# EAGLE board top (EAGLE 7.2.0)
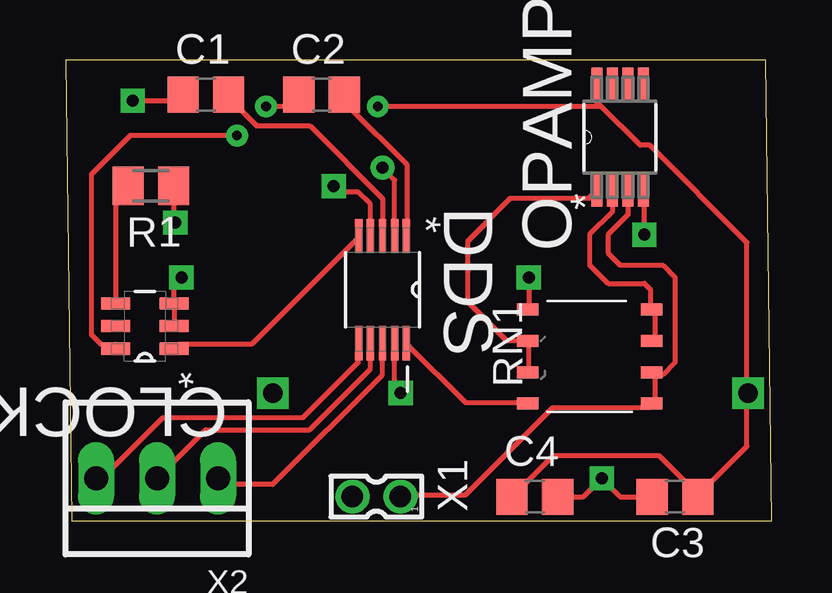
[diagram p0: board, top side]
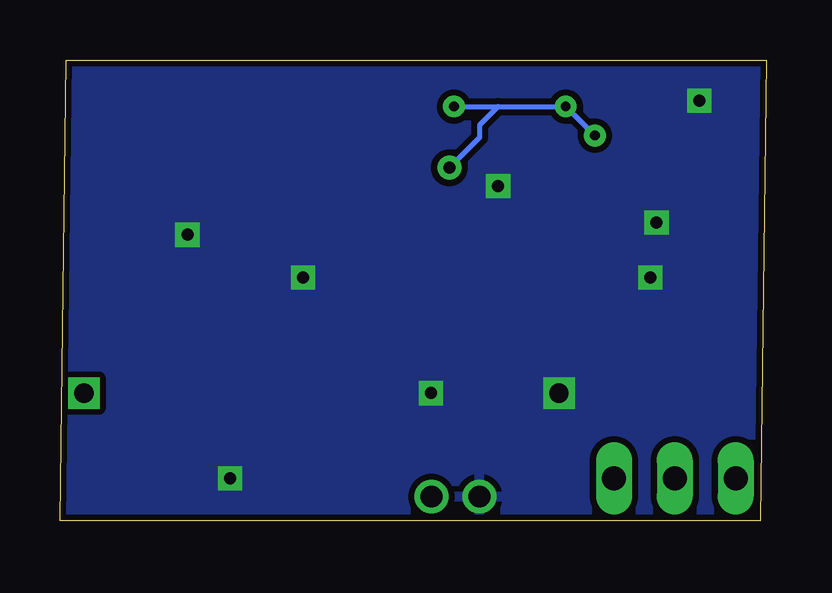
[diagram p1: board, bottom side, seen from below]

Size 29.44 x 19.23 mm. Coordinates in mm from the lower left corner, seen from the top.
Outline: 0.25,0 29.44,0 29.19,19.23 0,19.23 0.25,0
Copper layers (1*16): Top 0.035mm / dielectric 1.5mm / Bottom 0.035mm
Design rules "pcbtrain": minimum track width 0.2mm, minimum drill 0.4mm, track to track 0.2mm, track to pad 0.2mm, pad to pad 0.2mm, via to via 0.2mm, smd to smd 0mil, copper to edge 10mil, drill to drill 0.2mm, minimum pad ring 10mil, minimum via ring 10mil, stop-mask expansion 0.125mm, vias tented up to drill 0mil, thermal gap 10mil
Net classes: 0 default: clearance 0.205 mm
tRestrict: area 11.9,8.4 to 14.5,10.9; area 21.8,13 to 24.4,15.5; area 2.3,7.9 to 4.1,10.7

## Footprints (pad centres in the part's own frame; a part is rotated, then mirrored left to right if it is on the bottom)
C0805 = smd 1.3 x 1.5: 1 -0.95,0; 2 0.95,0
SOT95P280X100-6N = smd 1.219 x 0.508: 1 -1.219,0.94; 2 -1.219,0; 3 -1.219,-0.94; 4 1.219,-0.94; 5 1.219,0; 6 1.219,0.94
SOP50P490X110-10N = smd 1.422 x 0.305: 1 -2.235,0.991; 2 -2.235,0.508; 3 -2.235,0; 4 -2.235,-0.508; 5 -2.235,-0.991; 6 2.235,-0.991; 7 2.235,-0.508; 8 2.235,0; 9 2.235,0.508; 10 2.235,0.991
SOP65P490X109-8N = smd 1.372 x 0.457: 1 -2.21,0.965; 2 -2.21,0.33; 3 -2.21,-0.33; 4 -2.21,-0.965; 5 2.21,-0.965; 6 2.21,-0.33; 7 2.21,0.33; 8 2.21,0.965
M0805 = smd 1.3 x 1.6: 1 -0.95,0; 2 0.95,0
CTS742C083 = smd 0.5 x 0.9: 1 -2.47,-3.848; 2 -1.162,-3.848; 3 0.146,-3.848; 4 1.454,-3.848; 5 1.454,1.308; 6 0.146,1.308; 7 -1.162,1.308; 8 -2.47,1.308
332-02 = drill 0.9 pad 1.27: 1 0,-1; 2 0,1
22-23-2031 = drill 1 long: 1 -2.54,0; 2 0,0; 3 2.54,0

## Placement (x,y rotation side)
C1  100n  [C0805]  5.84,17.78 0 top
C2  10n  [C0805]  10.67,17.78 0 top
C3  10u  [C0805]  25.4,1.02 180 top
C4  0.1u  [C0805]  19.56,1.02 0 top
CLOCK  LTC6906IS6PBF  [SOT95P280X100-6N]  3.3,8.13 180 top
DDS  AD9833BRMZ  [SOP50P490X110-10N]  13.21,9.65 270 top
OPAMP  LMC6482IMM  [SOP65P490X109-8N]  23.11,16 90 top
R1  1000k  [M0805]  3.56,13.97 180 top
RN1  CTS742C083  [CTS742C083]  20.57,7.37 90 top
X1  332-02  [332-02]  12.95,1.02 90 top
X2  22-23-2031  [22-23-2031]  3.81,1.78 180 top

## Library data of the parts
C1-C4 R1 = resistor
CLOCK = LTC6906; MPN: LTC6906IS6#PBF; OC_FARNELL: 1432109; OC_NEWARK: 10R6975; PACKAGE: TSOT-23-6; SUPPLIER: Linear Technology
DDS = ad9833; MPN: AD9833BRMZ; OC_FARNELL: 1581966; OC_NEWARK: 19M1014; PACKAGE: MSOP-10; SUPPLIER: Analog Devices
OPAMP = LMC6482; MPN: LMC6482IMM; OC_FARNELL: 1468890; OC_NEWARK: 83F3826; PACKAGE: MSOP-8; SUPPLIER: NationalSemiconductor
RN1 = resistor-net; OC_FARNELL: unknown; OC_NEWARK: unknown
X1 = con-garry
X2 = con-molex; MF: MOLEX; MPN: 22-23-2031; OC_FARNELL: 1462950; OC_NEWARK: 30C0862

## Nets
FSYNC: DDS.8 X2.1
GND: C1.1 C3.2 C4.2 CLOCK.2 CLOCK.3 DDS.4 DDS.9 OPAMP.4 R1.1 RN1.5 X1.2
N$1: C1.2 DDS.3
N$2: C2.2 DDS.1
N$3: OPAMP.2 RN1.3 RN1.4
N$4: CLOCK.1 DDS.5
N$5: OPAMP.3 RN1.1 RN1.2 X1.1
N$6: DDS.10 RN1.8
N$7: OPAMP.1 RN1.6 RN1.7
N$8: CLOCK.4 R1.2
SCLK: DDS.7 X2.2
SDATA: DDS.6 X2.3
VDD: C2.1 C3.1 C4.1 CLOCK.6 DDS.2 OPAMP.8

## Tracks (layer width: path | path; a pad name or v marks a point on that pad's centre or on a via)
FSYNC
  Top 0.203: DDS.8 13.21,6.1 8.64,1.52 6.6,1.52 X2.1
GND  (via drill 0.5, 0.8)
  Top 0.203: CLOCK.2 CLOCK.3 4.52,9.86 v4.83,10.16 | v2.79,17.53 4.64,17.53 C1.1 | R1.1 4.51,12.51 v4.57,12.45 | v13.97,5.33 13.97,5.59 13.72,5.84 DDS.9 | v24.13,11.94 24.13,13.74 OPAMP.4 | C4.2 21.59,1.02 v22.35,1.78 23.11,1.02 C3.2 | v19.3,10.16 19.3,8.86 RN1.5 | DDS.4 12.7,13.21 12.19,13.72 11.43,13.72 v11.18,13.97
  other vias: 8.64,5.33
  pour Bottom (isolate 0.254): -0.51,19.56 -0.51,0 29.46,0 29.46,19.56
N$1
  Top 0.2: DDS.3 13.22,12.03 13.22,13.44 10.18,16.48 7.95,16.48 6.74,17.69 C1.2
N$2
  Top 0.2: DDS.1 14.23,12.03 14.23,14.86 11.8,17.29 11.8,17.69 C2.2
N$3
  Top 0.2: RN1.3 24.56,7.57 24.56,8.78 RN1.4
  Top 0.203: OPAMP.2 22.78,12.88 21.84,11.94 21.84,10.67 22.61,9.91 24.13,9.91 24.38,9.65 24.38,8.86 RN1.4
N$4
  Top 0.2: CLOCK.1 4.71,7.37 7.75,7.37 12.21,11.82 DDS.5
N$5
  Top 0.2: RN1.2 24.56,6.15 24.56,4.94 RN1.1 24.36,4.73 20.3,4.73 16.66,1.09 14.03,1.09 X1.1
  Top 0.203: OPAMP.3 23.44,12.78 22.61,11.94 22.61,11.18 23.11,10.67 24.89,10.67 25.4,10.16 25.4,6.6 24.89,6.1 24.53,6.1 RN1.2
N$6
  Top 0.2: RN1.8 19.09,4.94 16.66,4.94 14.23,7.37 DDS.10
N$7
  Top 0.2: RN1.7 19.29,6.36 19.29,7.37 RN1.6
  Top 0.203: RN1.6 18.4,7.51 16.76,9.14 16.76,11.68 18.54,13.46 21.82,13.46 OPAMP.1
N$8
  Top 0.2: CLOCK.4 2.08,9.19 2.08,13.44 2.49,13.85 R1.2
SCLK
  Top 0.203: X2.2 5.84,3.81 10.16,3.81 12.7,6.35 DDS.7
SDATA
  Top 0.203: X2.3 1.27,1.52 4.06,4.32 9.91,4.32 12.19,6.6 12.19,7.39 DDS.6
VDD  (via drill 0.4, 0.5, 0.8)
  Top 0.2: v7.14,16.08 2.69,16.08 1.07,14.45 1.07,7.77 1.47,7.37 2.08,7.37 CLOCK.6 | v8.36,17.29 9.17,17.29 9.57,17.69 C2.1 | 26.38,1.09 28.41,3.11 28.41,5.14 v28.45,5.33 28.41,5.34 28.41,11.62 24.36,15.67 23.95,15.67 22.33,17.29 | 22.33,17.29 22.13,17.49 22.13,18.1 OPAMP.8 | 26.38,1.09 24.76,2.71 20.3,2.71 18.68,1.09 C4.1 | 26.38,1.09 C3.1 | 22.33,17.29 v13.01,17.29
  Top 0.203: DDS.2 13.72,14.22 v13.21,14.73
  Bottom 0.2: v7.14,16.08 v8.36,17.29 11.18,17.29 v13.01,17.29
  Bottom 0.203: v13.21,14.73 11.94,16 11.94,16.53 11.18,17.29